# Altium PCB 板.PcbDoc (part 2 of 4)
Units mm, origin at the board's own origin, x right, y up, seen from the top; angles counter-clockwise.
Board outline 152.4 x 101.6 mm, 4 copper layers (Top Layer, VCC, GND, Bottom Layer); 183 components, 548 nets, 1331 pads, 689 vias.
Unrouted connection lines stored in the file: 6.
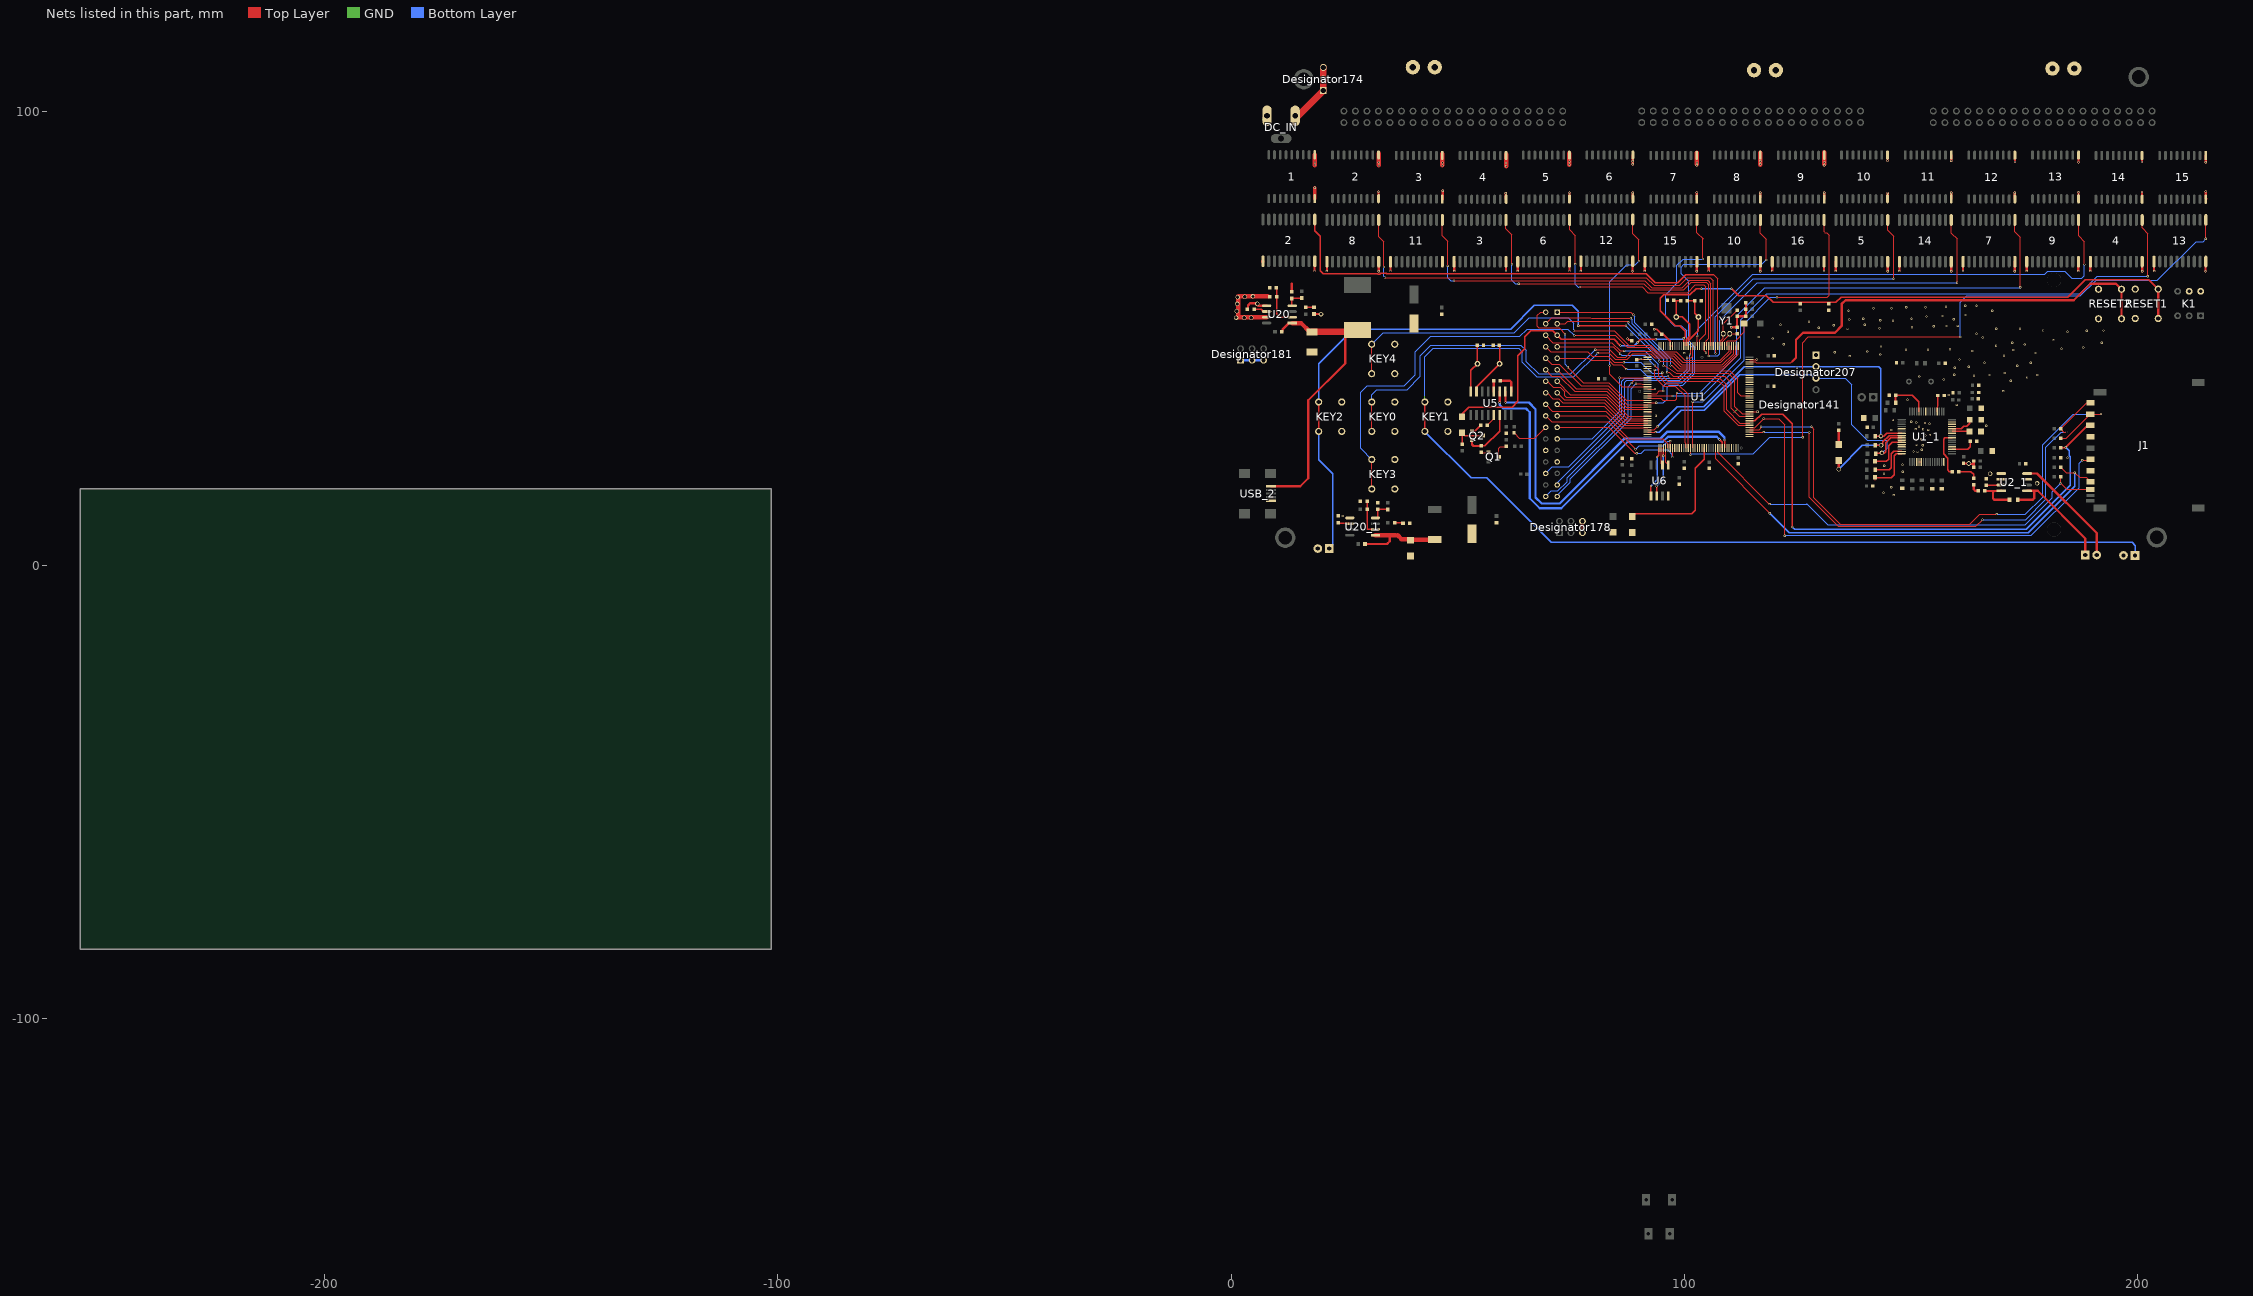
[diagram p4: the nets of this part, all layers, seen from the top]

## Via types
v1: diameter 0.5, hole 0.3, Top Layer to Bottom Layer, 646 vias
v2: diameter 1, hole 0.711, Top Layer to Bottom Layer, 35 vias
v3: diameter 0.5, hole 0.4, Top Layer to Bottom Layer, 2 vias
v4: diameter 1.27, hole 1.016, Top Layer to Bottom Layer, 2 vias
v5: diameter 1, hole 1, Top Layer to Bottom Layer, 2 vias
v6: diameter 3, hole 3, Top Layer to Bottom Layer, tented both sides, 2 vias

## Nets (pads, with @x,y where several pads share a name; then routed paths per layer and width w, separated by ;. In a path a pad name is that pad's centre, name@x,y a point inside that pad or via, vN(x,y) a via of type N, cw(c..) or ccw(c..) an arc to the next point about the centre after c; other vN are vias at no path point) (continued)
DIN1-3: K1.5 R1.2 U20.7 | length 17.3
  Top Layer w1: U20.7@7.826,54.635 4.445,54.635 1.576,54.635 1.576,59.233 v2(4.801,59.233) 8.077,59.233
  other v2: 2.87,54.534 4.445,54.534 1.092,54.559 1.245,55.982 1.346,57.582 1.422,59.055 2.972,59.182
EN: R1.1 R5.2@9.982,61.189 U20.2 | length 9.3
  Top Layer w0.3: R5.2@9.982,61.189 10.008,61.163 10.008,59.208 R1.1@10.034,59.182 10.034,57.023 10.058,56.999 10.058,55.448 10.871,54.635 U20.2@13.259,54.635
EN1: R1_2.1 R5_1.2 U20_1.2 | length 7.9
  Top Layer w0.3: R5_1.2@29.999,14.072 R1_2.1@29.999,12.268 29.999,8.024 30.175,7.849 U20_1.2@31.801,7.849
"F CS": U1.73 U6.1 | length 11.3
  Top Layer w0.3: U6.1@92.583,15.189 v1(92.583,17.424) ; v1(93.929,23.825) 94.323,24.219 U1.73@94.323,25.812
  Bottom Layer w0.3: v1(92.583,17.424) 93.929,18.771 v1(93.929,23.825)
FB: R4.1 R6.2 U20.4 | length 3.9
  Top Layer w0.3: U20.4@13.462,57.175 13.36,57.277 R4.1@13.36,58.776 13.411,58.826 15.494,58.826 R6.2@15.545,58.877
FB1: R4_1.1 R6_2.1 U20_1.4 | length 4.5
  Top Layer w0.3: U20_1.4@31.801,10.389 32.217,10.389 32.36,10.532 R4_1.1@32.36,12.267 32.372,12.254 34.48,12.254 R6_2.1@34.493,12.241
"FIFO OE": 
"FIFO RCLK": U1.134
"FIFO RRST": 
"FIFO WEN": U1.133
"FIFO WRST": 
FREQ: R3.1@5.055,56.439 U20.6 | length 3
  Top Layer w0.3: R3.1@5.055,56.439 6.581,56.439 7.114,55.905 U20.6@7.826,55.905
FREQ1: R3_1.1 U20_1.6 | length 2.6
  Top Layer w0.3: R3_1.1@23.622,9.346 23.79,9.178 26.105,9.178 U20_1.6@26.165,9.119
"FSMC A6": 12.11@88.57,76.203 U1.50 | length 48
  Top Layer w0.254: v1(83.49,43.993) 83.49,42.113 83.464,42.088 86.241,39.312 U1.50@91.823,39.312 ; 12.11@88.57,76.203 88.57,73.101 89.941,71.73 v1(89.941,67.031)
  Bottom Layer w0.254: v1(83.49,43.993) 83.49,62.433 87.249,66.192 89.103,66.192 v1(89.941,67.031)
"FSMC A7": 15.11@102.718,76.104 U1.53 | length 56
  Top Layer w0.25: U1.53@91.823,37.812 93.895,37.812 94.463,38.379 v1(95.301,38.379)
  Top Layer w0.254: 15.11@102.699,76.092 15.11@102.699,76.101 ; 15.11@102.718,76.104 102.718,73.304 104.064,71.958 104.038,71.933 v1(104.038,67.488)
  Bottom Layer w0.254: v1(95.301,38.379) 95.301,39.441 96.017,40.157 99.365,40.157 101.771,42.563 101.771,47.943 100.457,49.256 100.457,51.664 99.314,52.807 97.739,52.807 95.834,54.712 95.834,59.614 98.323,62.103 98.323,66.116 99.695,67.488 v1(104.038,67.488)
"FSMC A8": 4.11@200.921,76.101 U1.54 | length 139.1
  Top Layer w0.25: U1.54@91.823,37.312 91.825,37.31 97.31,37.31 v1(97.333,37.287) ; 4.11@200.921,76.101 200.921,74.365 202.184,73.101 202.184,63.729 v1(202.159,63.703)
  Bottom Layer w0.254: v1(97.333,37.287) 103.937,37.287 112.37,45.72 112.37,54.077 118.085,59.792 187.122,59.792 191.033,63.703 v1(202.159,63.703)
"FSMC A9": 7.11@172.857,76.101 U1.55 | length 114
  Top Layer w0.2: U1.55@91.823,36.812 94.76,36.812 95.225,36.347 97.968,36.347 98.323,36.703 v1(98.323,37.922)
  Top Layer w0.25: 7.11@172.857,76.101 172.857,73.523 174.041,72.339 v1(174.041,61.239)
  Bottom Layer w0.2: v1(98.323,37.922) 103.276,37.922 111.481,46.126 111.481,54.94 117.729,61.189 v1@174.126,61.189
"FSMC A10": Designator141.2 U1.56 | length 39.5
  Top Layer w0.2: Designator141.2@69.361,55.755 68.252,55.755 67.539,55.042 67.539,52.603 67.869,52.273 72.314,52.273 73.66,50.927 73.635,50.902 v1(73.635,50.883) ; v1(74.27,43.612) 77.699,40.183 83.312,40.183 87.183,36.312 U1.56@91.823,36.312
  Bottom Layer w0.2: v1(73.635,50.883) 73.635,44.247 v1(74.27,43.612)
"FSMC A11": 10.11@116.731,76.101 U1.57 | length 68.1
  Top Layer w0.2: U1.57@91.823,35.812 93.368,35.812 93.366,35.814 v1(93.751,35.814)
  Top Layer w0.25: 10.11@116.731,76.101 116.738,76.093 116.731,76.085 116.731,73.185 118.034,71.882 v1(118.034,67.285)
  Bottom Layer w0.2: v1(93.751,35.814) 95.348,35.814 96.139,36.605 96.139,39.167 96.571,39.599 99.593,39.599 102.241,42.247 102.241,48.076 100.889,49.428 100.889,62.611 99.212,64.287 99.212,65.71 99.797,66.294 117.043,66.294 v1(118.034,67.285)
"FSMC A12": 13.11@214.96,76.126 U1.87 | length 155.7
  Top Layer w0.2: v1@101.323,24.335 U1.87@101.323,25.812 ; v1(126.035,28.194) 126.035,49.073 127.254,50.292 v1(160.782,50.292) ; v1(214.96,71.933) 13.11@214.96,76.126
  Bottom Layer w0.2: v1(101.321,24.333) 101.566,24.578 115.162,24.578 118.803,28.219 118.828,28.194 v1(126.035,28.194) ; v1(160.782,50.292) 160.824,50.334 160.824,57.954 162.235,59.365 187.299,59.365 190.748,62.814 204.292,62.814 212.801,71.323 214.351,71.323 v1(214.96,71.933)
"FSMC A13": 16.11 U1.88 | length 72.1
  Top Layer w0.254: v1@101.803,36.017 v1(101.823,35.997) U1.88@101.823,25.812 ; v1(120.371,59.055) 131.445,59.055 131.902,59.512 131.902,72.72 131.318,73.304 130.911,73.304 130.762,73.453 16.11@130.762,76.101
  Bottom Layer w0.254: v1(101.823,35.997) 104.044,35.997 113.157,45.11 113.157,53.264 118.927,59.034 120.349,59.034 v1(120.371,59.055)
"FSMC A14": U1.89
"FSMC A15": U1.90
"FSMC A16": U1.80
"FSMC A17": U1.81
"FSMC A18": U1.82
"FSMC D0": Designator141.6 U1.85 | length 51.2
  Top Layer w0.254: Designator141.6@69.361,50.675 70.964,49.073 83.974,49.073 85.828,47.219 v1(86.69,47.219) ; v1(93.396,43.028) 93.396,41.427 95.377,39.446 97.993,39.446 100.138,37.301 100.138,26.986 100.277,26.847 100.277,25.858 U1.85@100.323,25.812
  Bottom Layer w0.254: v1(86.69,47.219) 91.262,47.219 94.209,44.272 94.209,43.028 v1(93.396,43.028)
"FSMC D1": Designator141.7 U1.86 | length 46
  Top Layer w0.254: Designator141.7@71.907,48.133 84.226,48.133 v1(85.776,46.584) ; v1(93.472,43.993) 94.285,43.18 94.285,41.605 95.885,40.005 98.425,40.005 100.823,37.607 U1.86@100.823,25.812
  Bottom Layer w0.254: v1(85.776,46.584) 85.842,46.584 86.122,46.304 91.161,46.304 v1(93.472,43.993)
"FSMC D2": Designator141.8 U1.114 | length 55.9
  Top Layer w0.254: Designator141.8@69.367,48.133 70.485,47.015 78.638,47.015 79.629,46.025 83.185,46.025 84.506,44.704 v1(86.614,44.704) ; v1(95.047,42.418) 95.047,41.758 96.266,40.538 107.569,40.538 108.712,39.395 108.712,33.909 111.809,30.812 U1.114@114.323,30.812
  Bottom Layer w0.254: v1(86.614,44.704) 90.38,44.704 92.819,42.266 94.894,42.266 v1(95.047,42.418)
"FSMC D3": Designator141.9 U1.115 | length 51.7
  Top Layer w0.2: Designator141.9@71.901,45.595 78.916,45.595 79.375,45.136 83.312,45.136 84.277,44.171 86.182,44.171 v1(87.147,43.205) ; v1(96.317,41.681) 96.291,41.681 96.799,41.173 107.789,41.173 109.245,39.717 109.245,34.188 112.122,31.312 U1.115@114.323,31.312 U1.115@114.304,31.293
  Bottom Layer w0.2: v1(87.147,43.205) 90.195,43.205 91.719,41.681 v1(96.317,41.681)
"FSMC D4": Designator141.10 U1.58 | length 26.7
  Top Layer w0.2: Designator141.10@69.367,45.593 70.663,44.298 72.39,44.298 77.165,39.522 83.134,39.522 87.345,35.312 U1.58@91.823,35.312
"FSMC D5": Designator141.11 U1.59 | length 23.3
  Top Layer w0.2: Designator141.11@71.907,43.053 76.098,38.862 83.033,38.862 87.083,34.812 U1.59@91.823,34.812
"FSMC D6": Designator141.12 U1.60 | length 26.1
  Top Layer w0.2: Designator141.12@69.367,43.053 70.739,41.681 72.365,41.681 75.743,38.303 82.829,38.303 86.821,34.312 U1.60@91.823,34.312
"FSMC D7": Designator141.13 U1.63 | length 23.1
  Top Layer w0.2: Designator141.13@71.907,40.513 74.828,37.592 82.804,37.592 87.611,32.785 91.796,32.785 U1.63@91.823,32.812
"FSMC D8": Designator141.14 U1.64 | length 26.4
  Top Layer w0.2: Designator141.14@69.367,40.513 69.672,40.513 70.993,39.192 72.542,39.192 73.558,38.176 73.558,37.324 73.9,36.982 82.677,36.982 87.348,32.312 U1.64@91.823,32.312
"FSMC D9": Designator141.15 U1.65 | length 22.5
  Top Layer w0.2: Designator141.15@71.907,37.973 73.457,36.424 82.423,36.424 87.035,31.812 U1.65@91.823,31.812
"FSMC D10": Designator141.16 U1.66 | length 25.2
  Top Layer w0.2: Designator141.16@69.367,37.973 69.698,37.973 70.968,36.703 72.263,36.703 73.127,35.839 82.245,35.839 86.773,31.312 U1.66@91.823,31.312
"FSMC D11": Designator141.17 U1.67 | length 21.8
  Top Layer w0.2: Designator141.17@71.907,35.433 72.288,35.052 82.245,35.052 86.486,30.812 U1.67@91.823,30.812
"FSMC D12": Designator141.18 U1.68 | length 24.6
  Top Layer w0.2: Designator141.18@69.367,35.433 70.841,33.96 82.601,33.96 86.249,30.312 U1.68@91.823,30.312
"FSMC D13": Designator141.19 U1.77 | length 27.9
  Top Layer w0.2: Designator141.19@71.907,32.893 82.702,32.893 87.711,27.885 95.201,27.885 96.323,26.763 U1.77@96.323,25.812
"FSMC D14": Designator141.20 U1.78 | length 32.8
  Top Layer w0.2: Designator141.20@69.367,32.893 70.714,31.547 83.134,31.547 v1(89.179,25.502) ; U1.78@96.823,25.812 96.824,25.813 v1(96.825,27.33) v1(96.825,27.33)
  Bottom Layer w0.2: v1(89.179,25.502) 89.992,26.314 95.26,26.314 96.275,27.329 v1(96.825,27.33) v1(96.825,27.33)
"FSMC D15": Designator141.21 U1.79 | length 31.2
  Top Layer w0.2: Designator141.21@71.907,30.353 83.261,30.353 88.976,24.638 v1(89.433,24.638) ; U1.79@97.323,25.812 97.349,25.785 97.349,23.816 v1(97.333,23.8)
  Bottom Layer w0.2: v1(89.433,24.638) 90.449,24.638 91.237,25.425 96.266,25.425 97.333,24.359 v1(97.333,23.8) v1@97.273,23.859
"FSMC NE3": 
"FSMC NE4": Designator141.1 U1.127 | length 53.7
  Top Layer w0.254: Designator141.1@71.901,55.755 88.136,55.755 88.671,55.22 v1(88.748,55.22) ; v1(96.901,44.018) 97.18,44.018 98.387,42.812 109.944,42.812 111.709,41.046 111.709,38.024 112.421,37.312 U1.127@114.323,37.312
  Bottom Layer w0.254: v1@88.595,55.194 88.987,54.803 88.987,53.38 96.901,45.466 v1(96.901,44.018)
"FSMC NOE": Designator141.4 U1.118 | length 61.4
  Top Layer w0.254: Designator141.4@69.361,53.215 70.731,54.585 79.325,54.585 79.503,54.407 v1(88.163,54.407) ; v1(96.139,42.494) 96.647,42.494 97.46,41.681 108.864,41.681 110.323,40.223 110.323,34.533 112.045,32.812 U1.118@114.323,32.812
  GND w0.254: 110.82,33.731 110.998,33.731 111.709,34.442
  Bottom Layer w0.254: v1(88.163,54.407) 88.417,54.153 88.417,53.264 96.139,45.542 v1(96.139,42.494)
"FSMC NWE": Designator141.3 U1.119 | length 55.6
  Top Layer w0.254: Designator141.3@71.901,53.215 73.687,53.215 74.193,53.721 87.452,53.721 v1(87.605,53.569) ; v1(95.359,43.945) 95.505,44.091 98.117,42.294 109.598,42.294 111.049,40.844 111.049,34.95 112.688,33.312 U1.119@114.323,33.312
  Bottom Layer w0.254: v1(87.605,53.569) 87.605,53.188 95.359,45.434 v1(95.359,43.945)
GBUF: 
GND: 1.9 2.1@7.01,67.003 2.9@32.512,80.797 2.10@18.44,67.003 3.1@49.174,66.901 3.9@46.558,80.696 3.10@60.604,66.901 4.1@189.491,66.901 4.9@60.63,80.67 4.10@200.921,66.901 5.1@133.364,66.901 5.9@74.6,80.747 5.10@144.794,66.901 6.1@63.206,66.901 6.9@88.595,80.772 6.10@74.636,66.901 7.1@161.427,66.901 7.9@102.692,80.696 7.10@172.857,66.901 8.1@21.11,66.901 8.9@116.713,80.747 8.10@32.54,66.901 9.1@175.459,66.901 9.9@130.81,80.721 9.10@186.889,66.901 10.1@105.301,66.901 10.9@144.755,80.772 10.10@116.731,66.901 11.1@35.142,66.901 11.9@158.826,80.772 11.10@46.572,66.901 12.1@77.14,67.003 12.9@172.847,80.747 12.10@88.57,67.003 13.1@203.53,66.926 13.9@186.889,80.768 13.10@214.96,66.926 14.1@147.396,66.901 14.9@200.889,80.67 14.10@158.826,66.901 15.1@91.288,66.904 15.9@214.935,80.67 15.10@102.718,66.904 16.1 16.10 C1.1@141.503,17.424 C2_1.1 C3.1 C3_1.1 C3_2.1 C4.1@111.582,54.839 C4.2@40.361,53.289 C4_1.2 C4_2.2 C5.1 C6.1 C6_1.2 C7.1 C7_1.1 C8.1 C8_1.2 C9.1 C9_1.1 C10.1 C10_1.1 C11.2 C12.2 C13.2 C13_1.2 C14.2 C14_1.2 C15.2 C15_1.1 C16.2 C16_1.2 C17.2 C17_1.2 C18.2 C19.2 C19_1.2 C20.2 C20_1.2 C21.2 C21_1.1 C22.2 C32.2 C34_1.2 C37.1 C38.1 C39.1 C41.2 C42.1 C43.2 C44.1 D1_2.2 D1_3.2 D13.1 D13_1.1 DC_IN.2 Designator141.22 Designator141.26 Designator141.27 Designator178.5 Designator178.6 Designator181.1 Designator181.3 Designator181.5 Designator207.1 J1.3 J1.6 KEY0.1 KEY1.1 KEY2.1 KEY3.1 KEY4.1 P4_3.2 P4_4.2 pad.69 R1_1.1 R2.2@18.263,55.347 R2_2.2 R3.2@3.555,56.439 R3_1.2 R4.2 R4_1.2 R5.1 R5_1.1 R10_1.1 R23_1.1 R32_1.2 RESET1.2 RESET2.2 U1.16 U1.30 U1.31 U1.38 U1.51 U1.61 U1.71 U1.83 U1.94 U1.107 U1.120 U1.130 U1.143 U1_1.4 U1_1.10 U1_1.14 U1_1.25 U1_1.37 U1_1.52 U1_1.64 U2_1.1 U2_1.7 U5.1 U6.4 U20.5 U20_1.5 USB_2.5 | length 145.1
  Top Layer w0.2: C43.2@62.381,29.121 63.562,27.94 66.946,27.94 Designator141.22@69.361,30.355 ; 68.28,29.266 Designator141.22@69.367,30.353 ; C18.2@81.013,41.073 C18.2@81.039,41.099 ; C20.2@89.41,45.352 U1.38@91.783,45.352 ; U1.61@91.823,33.812 92.774,33.812 ; U1.51@91.823,38.812 v1(93.472,38.811) ; U1.31@96.823,48.312 U1.30@97.323,48.312
  Top Layer w0.254: U1.16@104.323,48.312 104.323,47.214 v1(104.724,46.812) ; U1.120@114.323,33.812 pad.69@116.074,33.812 ; U1.143@114.323,45.312 v1@115.924,45.312 ; C3_1.1@140.259,30.074 C3_1.1@140.259,30.404
  Top Layer w0.3: v1@93.294,52.019 93.853,52.019 C9.1@94.996,50.876 95.322,50.876 96.8,49.398 U1.31@96.8,48.335 ; C41.2@98.804,17.599 C41.2@98.804,17.843
  Top Layer w0.5: R3.2@3.555,56.439 3.705,56.589 3.705,57.248 4.166,57.709 5.359,57.709 5.892,57.175 U20.5@7.826,57.175 ; R4.2@13.36,60.276 13.36,62.078 ; R2.2@18.263,55.347 v2(19.812,55.347) ; v1(18.364,64.821) 2.10@18.364,66.926 ; v1@21.11,64.849 8.1@21.11,66.901 ; U20_1.5@25.424,10.389 U20_1.5@26.165,10.389 ; v1(32.512,82.296) 32.512,81.102 32.41,81.001 2.9@32.563,80.848 ; v1(32.563,64.77) 8.10@32.563,66.878 ; v1@35.142,64.835 11.1@35.142,66.901 ; 3.9@46.66,80.594 46.66,82.144 46.685,82.169 v1(46.685,82.525) ; v1(49.174,64.821) 3.1@49.174,66.901 ; C37.1@59.309,40.665 61.468,40.665 61.747,40.386 U5.1@61.747,38.236 ; v1(60.554,81.966) 60.554,80.747 4.9@60.604,80.696 ; v1(60.604,64.821) 3.10@60.604,66.901 ; C43.2@62.355,29.096 C43.2@62.381,29.121 ; v1(63.195,64.821) 63.206,64.831 6.1@63.206,66.901 ; Designator141.26@69.03,25.277 Designator141.26@69.363,25.277 ; Designator141.22@69.367,30.353 Designator141.22@69.367,30.616 ; 5.9@74.6,80.747 v1(74.6,82.093) ; v1(74.625,64.821) 6.10@74.625,66.89 ; v1@77.14,64.846 12.1@77.14,67.003 ; v1(87.401,49.886) 87.664,49.623 88.259,49.623 C44.1@88.39,49.492 ; v1(88.494,64.795) 12.10@88.494,66.926 ; 6.9@88.595,80.772 v1(88.595,82.118) ; v1(91.237,64.821) 15.1@91.237,66.548 ; v1(102.692,64.795) 15.10@102.692,66.894 ; 7.9@102.692,80.696 v1(102.692,82.144) ; v1@105.301,64.838 10.1@105.301,66.901 ; v1(110.312,52.426) C3.1@111.582,52.426 C4.1@111.582,54.839 113.524,54.839 C14.2@113.524,57.836 ; 8.9@116.662,81.102 116.713,81.153 v1(116.713,82.093) ; v1(116.713,64.795) 10.10@116.713,66.883 ; v1@119.332,64.849 16.1@119.332,66.901 ; v1(130.734,64.821) 16.10@130.734,66.872 ; 9.9@130.81,80.721 v1(130.81,82.093) ; v1@133.364,64.86 5.1@133.364,66.901 ; 10.9@144.755,80.772 144.78,80.797 v1(144.78,82.067) ; v1(144.831,64.77) 5.10@144.831,66.864 ; C20_1.2@145.141,37.444 C20_1.2@145.141,37.583 ; v1@147.396,64.846 14.1@147.396,66.901 ; v1(158.801,64.795) 14.10@158.801,66.876 ; v1(158.801,82.118) 158.801,80.848 11.9@158.852,80.797 ; v1@161.427,64.857 7.1@161.427,66.901 ; C2_1.1@161.519,22.454 161.582,22.39 v2(162.674,22.39) 162.763,22.301 163.792,22.301 ; C10_1.1@163.779,22.937 163.792,22.925 163.792,22.301 ; C7_1.1@163.805,21.514 163.792,21.526 163.792,22.301 ; C17_1.2@164.821,38.009 C17_1.2@164.859,38.048 ; C13_1.2@165.303,31.902 C13_1.2@165.43,32.029 ; C8_1.2@165.405,34.544 C8_1.2@165.456,34.595 ; v1(172.822,64.77) 7.10@172.822,66.865 ; 12.9@172.822,80.772 172.898,80.848 172.822,80.924 v1(172.822,82.093) ; v1@175.459,64.842 9.1@175.459,66.901 ; v1(186.842,64.821) 9.10@186.842,66.854 ; 13.9@186.864,80.793 186.893,80.823 v1(186.893,82.194) ; v1@189.491,64.827 4.1@189.491,66.901 ; J1.3@189.493,28.291 J1.3@189.743,28.042 ; 14.9@200.863,80.696 200.889,80.721 v1(200.889,82.271) ; v1(200.914,64.77) 4.10@200.914,66.894 ; 13.1@203.53,66.926 203.53,64.846 v1(203.556,64.821) ; v1(214.909,64.77) 13.10@214.909,66.876 ; v1(214.96,82.372) 214.96,80.848 15.9@215.036,80.772
  Top Layer w0.762: 2.1@6.934,66.926 2.1@7.01,67.003 ; 1.9@18.44,80.823 v1@18.44,83.16 ; Designator178.5@77.47,7.112 Designator178.6@77.47,9.652
  GND w0.254: 90.716,49.847 90.729,49.86
  GND w0.635: KEY3.1@36.093,16.612 KEY3.1@36.093,16.764
  GND w0.762: DC_IN.2@7.219,98.362 DC_IN.2@7.917,99.06
  Bottom Layer w0.5: Designator181.1@2.083,45.161 Designator181.3@4.623,45.161 Designator181.5@7.163,45.161
  other v1: 24.613,10.82 146.126,15.418 143.866,15.926 145.567,17.17 143.993,20.117 148.107,20.549 144.018,21.895 148.057,22.098 184.455,23.673 151.359,24.943 150.47,25.044 152.324,25.425 152.527,26.441 151.13,26.492 151.028,27.61 152.197,27.711 153.111,28.575 154.102,28.651 151.46,29.007 145.593,29.769 153.721,29.794 152.603,29.947 151.003,29.972 151.689,30.505 154.026,31.166 153.01,31.318 151.105,31.445 149.962,31.598 145.948,32.004 93.675,32.893 160.02,35.312 149.174,36.424 158.241,37.49 170.307,38.354 171.958,40.665 157.15,40.919 175.539,41.377 151.765,41.554 163.83,41.758 167.234,41.91 177.775,41.91 159.487,41.961 170.586,42.342 159.614,43.485 162.687,43.713 173.38,43.967 176.327,44.602 166.141,44.628 115.926,45.314 160.63,45.314 90.348,45.441 136.449,46.076 170.434,46.126 143.129,46.406 99.949,46.735 177.394,46.761 133.096,46.939 140.259,47.066 163.424,47.193 172.491,47.422 153.67,47.447 148.819,47.498 158.547,47.6 183.134,47.701 187.935,47.981 143.332,48.184 168.707,48.336 175.031,48.616 121.895,48.692 172.237,48.997 192.024,49.047 181.381,49.606 119.431,49.936 165.735,50.19 116.357,50.292 164.389,50.978 122.784,51.435 184.455,51.46 188.697,51.664 179.07,51.714 192.405,51.74 93.294,51.994 135.941,52.07 168.732,52.095 173.99,52.095 142.977,52.222 129.591,52.324 150.165,52.451 154.965,52.654 157.759,52.705 160.274,52.73 132.918,52.883 121.158,53.01 139.725,53.01 127.432,53.67 145.974,53.899 143.129,54 136.296,54.153 159.36,54.178 150.063,54.305 139.421,54.331 153.365,54.813 156.87,54.915 161.95,55.143 136.169,56.058 167.843,56.058 141.656,56.642 145.644,56.642 153.137,56.82 148.895,56.845 157.658,56.972 161.874,57.175 164.363,57.201 21.082,64.821 35.128,64.821 77.114,64.821 105.283,64.821 119.304,64.821 133.325,64.821 147.371,64.821 161.392,64.821 175.438,64.821 189.484,64.821 18.415,83.185
  other v2: 177.749,17.983 167.386,20.142 5.791,57.633
  other v3: 166.548,30.734
IIC_SCL: R17_1.2 U1_1.47 | length 9.3
  Top Layer w0.3: R17_1.2@142.011,21.057 142.037,21.031 145.161,21.031 145.618,21.488 145.618,24.486 146.178,25.046 U1_1.47@147.891,25.046
IIC_SDA: R18_1.2 U1_1.48 | length 11.2
  Top Layer w0.254: 142.008,18.742 R18_1.2@142.008,19.304
  Top Layer w0.3: R18_1.2@141.856,19.253 141.881,19.279 145.618,19.279 146.253,19.914 146.253,24.105 146.694,24.546 U1_1.48@147.891,24.546
IOVDD: 
"IWIRE DQ": 
"JOY CLK": J1.5 U1.113 | length 111.3
  Top Layer w0.254: U1.113@114.323,30.312 115.478,30.312 v1@117.462,32.296 ; v1(117.45,32.309) 120.752,32.309 122.072,30.988 v1(122.072,6.426) ; v1(187.706,23.114) 189.316,23.114 J1.5@189.493,23.291
  Bottom Layer w0.254: v1@122.098,6.325 122.301,6.528 176.505,6.528 187.02,17.043 187.02,22.428 v1(187.706,23.114)
"JOY DAT": J1.8 R28.1 U1.99 | length 96.4
  Top Layer w0.254: U1.99@107.323,25.812 107.323,24.822 118.708,13.437 v1(118.796,13.437) ; R28.1@182.931,19.456 v1(182.931,18.034) 184.302,16.662 J1.8@189.484,16.662
  Bottom Layer w0.254: v1(118.796,13.437) 126.924,13.437 126.949,13.462 131.572,8.839 175.082,8.839 181.102,14.859 181.102,16.205 v1(182.931,18.034)
"JOY LAT": J1.7 R27.1 U1.98 | length 103.5
  Top Layer w0.2: U1.98@106.823,25.812 106.823,23.384 v1(118.777,11.43) ; R27.1@182.931,21.575 184.16,20.345 v1(186.055,20.345) 186.073,20.345 187.114,19.304 188.555,19.304 J1.7@189.493,18.366
  Bottom Layer w0.3: v1(118.777,11.43) 123.095,7.112 175.844,7.112 186.055,17.323 v1(186.055,20.345)
JRDO: 
JTCK: U1.109
JTDI: U1.110
JTMS: U1.105
KEY0: KEY0.2 U1.3 | length 106.6
  Top Layer w0.254: KEY0.2@31.013,29.464 KEY0.2@31.013,35.964 ; v1@80.289,47.523 v1(80.315,47.498) 83.49,47.498 85.154,45.834 87.007,45.834 88.29,47.117 92.62,47.117 93.629,46.107 97.453,46.107 99.416,44.145 108.331,44.145 110.823,46.637 U1.3@110.823,48.312
  Bottom Layer w0.254: KEY0.2@31.013,35.964 31.013,37.567 32.106,38.659 38.811,38.659 41.732,41.58 41.732,46.177 44.069,48.514 63.902,48.514 65.1,47.316 65.1,44.875 67.847,42.128 74.945,42.128 v1(80.315,47.498)
KEY1: KEY1.2 P4_3.1 U1.2 | length 267.9
  Top Layer w0.2: v1(80.848,46.736) 80.95,46.838 83.254,46.838 84.752,45.339 87.325,45.339 88.57,46.584 92.549,46.584 93.452,45.68 97.22,45.68 99.187,43.713 108.509,43.713 111.323,46.527 U1.2@111.323,48.312
  Top Layer w0.3: KEY1.2@42.723,29.464 KEY1.2@42.723,35.964
  GND w0.254: KEY1.2@42.723,35.964 42.723,37.236
  Bottom Layer w0.254: KEY1.2@42.723,35.964 42.723,45.923 44.552,47.752 63.373,47.752 64.237,46.888 64.237,44.679 67.437,41.478 75.59,41.478 v1(80.848,46.736)
  Bottom Layer w0.3: KEY1.2@42.723,29.464 42.723,29.39 52.911,19.202 56.388,19.202 70.561,5.029 198.704,5.029 199.441,4.293 199.441,2.21 P4_3.1@199.339,2.108
KEY2: KEY2.2 P4_4.1 U1.1 | length 151.6
  Top Layer w0.2: v1(94.463,44.958) 97.18,44.958 98.831,43.307 108.668,43.307 111.823,46.462 U1.1@111.823,48.312 U1.1@111.823,48.602
  Top Layer w0.3: KEY2.2@19.304,29.464 KEY2.2@19.304,35.964 ; v1(76.53,52.756) v1(87.071,52.756)
  Bottom Layer w0.2: v1(87.071,52.756) 94.463,45.364 v1(94.463,44.958)
  Bottom Layer w0.3: KEY2.2@19.304,29.464 19.304,23.266 22.443,20.127 22.443,4.435 P4_4.1@21.641,3.632 ; KEY2.2@19.304,35.964 19.304,44.348 26.975,52.019 61.62,52.019 66.853,57.252 75.26,57.252 76.53,55.982 v1(76.53,52.756)
KEY3: KEY3.2 U1.4 | length 118.2
  Top Layer w0.254: KEY3.2@31.013,16.764 KEY3.2@31.013,23.264 ; v1(75.667,50.622) 84.734,50.622 87.325,48.031 92.347,48.031 93.817,46.561 97.723,46.561 99.621,44.664 108.018,44.664 110.323,46.968 U1.4@110.323,48.312
  Bottom Layer w0.254: KEY3.2@31.013,23.264 28.55,25.728 28.55,38.125 29.997,39.573 38.202,39.573 40.64,42.012 40.64,47.015 44.047,50.422 63.637,50.422 65.26,52.045 74.244,52.045 v1(75.667,50.622)
KEY4: KEY4.2 U1.5 | length 94.6
  Top Layer w0.254: KEY4.2@30.988,42.192 KEY4.2@30.988,48.692 ; v1(75.59,51.714) 84.48,51.714 87.706,48.489 92.532,48.489 94.005,47.015 98.12,47.015 100.018,45.118 107.83,45.118 109.823,47.11 U1.5@109.823,48.312
  Bottom Layer w0.254: KEY4.2@31.013,48.664 33.53,51.181 62.382,51.181 65.735,54.534 74.346,54.534 75.59,53.289 v1(75.59,51.714)
l1: 
l2: 
"LCD BL": Designator141.23 U1.46 | length 29.9
  Top Layer w0.2: v1(85.649,41.3) 85.66,41.312 U1.46@91.823,41.312
  Bottom Layer w0.2: Designator141.23@71.901,27.815 79.58,27.815 85.649,33.884 v1(85.649,41.3)
LED0: U1.135
LED1: 
LRCK: 
M1: 
M2: 
M2_2: 
M3: 
M3_1: C2.2 R2.1@18.263,56.847 | length 1.8
  Top Layer w0.3: C2.2@16.434,56.82 16.447,56.833 18.249,56.833 R2.1@18.263,56.847
M4: C2_2.2 R2_2.1 | length 1.8
  Top Layer w0.3: C2_2.2@36.069,9.296 36.095,9.271 37.871,9.271 R2_2.1@37.897,9.246
M5: C11_2.1 R31.1 U2_1.4 | length 9.2
  Top Layer w0.5: C11_2.1@166.192,16.358 166.211,16.338 168.314,16.338 ; U2_1.4@169.839,16.358 169.82,16.338 168.314,16.338 ; R31.1@171.657,14.376 168.314,14.376 168.021,14.669 168.021,16.046 168.314,16.338
M6: C11_1.2 C11_3.1 | length 4.3
  Top Layer w0.3: C11_3.1@160.452,20.613 160.466,20.599 163.119,20.599 163.728,19.99 C11_1.2@163.728,19.239
M7: 
M8: 
MCLK: 
MIC_BIAS: C13_1.1 U1_1.12 | length 5.2
  Top Layer w0.3: U1_1.12@158.991,30.046 160.998,30.046 161.533,30.58 162.254,30.58 162.89,31.217 C13_1.1@162.89,32.029
MIC_N: U1_1.13
MIC_P: U1_1.15
"MP3 LEFT": 
"MP3 RIGHT": 
NetANT1_1: 
NetBAT_1: 
NetBEEP1_2: 
NetBOOT1_3: 
NetBOOT1_4: 
NetC3_2: C3.2@111.581,51.041 U1.8 Y1.2 | length 5
  Top Layer w0.2: U1.8@108.323,48.312 108.323,49.263 109.957,50.897 Y1.2@109.957,51.029 C3.2@111.568,51.029
NetC4_2: C4.2@111.584,56.223 U1.9 Y1.1 | length 9.5
  Top Layer w0.2: U1.9@107.823,48.312 107.823,49.329 108.534,50.04 Y1.1@108.534,51.029 108.534,53.173 C4.2@111.584,56.223
NetC7_2: C7.2 R2.1@99.187,58.318 U1.24 Y2.1 | length 13.8
  Top Layer w0.3: C7.2@97.612,58.344 97.625,58.331 98.171,58.331 ; Y2.1@98.171,54.712 98.171,58.331 ; Y2.1@98.323,54.712 99.517,54.712 101.117,53.111 101.117,50.434 100.323,49.64 U1.24@100.323,48.312 ; R2.1@99.187,58.318 99.174,58.331 98.171,58.331
NetC8_2: C8.2 R2.2@100.571,58.317 U1.23 Y2.2 | length 13.1
  Top Layer w0.3: R2.2@100.571,58.317 100.595,58.293 102.224,58.293 C8.2@102.248,58.269 102.248,55.515 Y2.2@103.051,54.712 ; U1.23@100.823,48.312 100.823,49.432 103.051,51.661 Y2.2@103.051,54.712 ; Y2.2@103.203,54.712 Y2.2@103.051,54.712
NetC11_2: C11_3.2 U1_1.8 | length 10.3
  Top Layer w0.3: U1_1.8@158.991,28.046 157.408,28.046 157.124,27.762 157.124,24.511 158.039,23.597 158.039,20.98 158.42,20.599 159.052,20.599 C11_3.2@159.068,20.615
NetC14_1: C14_1.1 U1_1.11 | length 3.9
  Top Layer w0.3: U1_1.11@158.991,29.546 162.758,29.546 C14_1.1@162.839,29.464
NetC22_1: 
NetC22_2: 
NetC30_2: 
NetC32_1: R32_1.1 U2_1.2 U2_1.3 | length 4.5
  Top Layer w0.254: U2_1.3@169.839,17.628 U2_1.2@169.839,18.898
  Top Layer w0.3: R32_1.1@166.572,17.64 166.578,17.634 169.833,17.634 U2_1.3@169.839,17.628
NetC33_1: C11_1.1 C11_2.2 | length 2.3
  Top Layer w0.5: C11_1.1@163.678,17.805 163.767,17.716 163.767,16.674 164.084,16.358 164.806,16.358 C11_2.2@164.808,16.359
NetC37_2: C37.2 U5.4 | length 2.4
  Top Layer w0.5: U5.4@57.937,38.236 C37.2@57.937,40.654
NetC38_2: C38.2 U5.7 Y3.1 | length 12.4
  Top Layer w0.3: U5.7@54.127,38.236 54.127,39.319 Y3.1@59.207,44.399 59.188,44.418 59.188,48.468 C38.2@59.169,48.487
NetC39_2: C39.2 U5.8 Y3.2 | length 10.9
  Top Layer w0.3: U5.8@52.857,38.236 52.857,42.929 Y3.2@54.327,44.399 54.297,44.429 54.297,48.485 C39.2@54.267,48.516
NetC46_1: 
NetC49_1: 
NetC49_2: 
NetC50_1: 
NetC50_2: 
NetC55_2: 
NetC57_1: 
NetC58_1: 
NetC66_2: 
NetC67_2: 
NetC68_2: 
NetC69_2: 
NetC70_1: 
NetC70_2: 
NetC74_2: 
NetC75_2: 
NetC76_2: 
NetC77_1: 
NetC77_2: 
NetC78_1: 
NetC78_2: 
NetC79_1: 
NetC80_1: 
NetC81_1: 
NetC82_1: 
NetC91_2: 
NetCAN1_1: 
NetCAN1_3: 
NetD1_1: D1_1.1 RX1.2 | length 3.2
  Top Layer w0.5: RX1.2@133.983,29.731 133.983,26.57 D1_1.1@133.985,26.568
NetD1_2: D1.2 U1.6 | length 7.5
  Top Layer w0.2: U1.6@109.323,48.312 109.323,49.263 109.572,49.512 111.237,49.512 113.132,51.406 D1.2@113.132,53.289
NetD4_1: 1.10 2.10@32.512,90.449 3.10@46.558,90.348 4.10@60.63,90.322 5.10@74.6,90.399 6.10@88.595,90.424 7.10@102.692,90.348 8.10@116.713,90.399 9.10@130.81,90.373 10.10@144.755,90.424 11.10@158.826,90.424 12.10@172.847,90.399 13.10@186.889,90.42 14.10@200.889,90.322 15.10@214.935,90.322 ?.1 ?.2 DC_IN.1 Designator174.1 Designator174.2 Designator174.3 K1.6 | length 44.6
  Top Layer w0.5: v1(88.595,88.367) 88.595,89.002 v1(88.57,89.027) 88.57,90.32 6.10@88.597,90.346 ; v1(144.755,89.179) 144.755,90.322 144.805,90.373 10.10@144.755,90.424 ; v1(158.826,89.129) 11.10@158.826,90.424 ; v1(172.872,88.9) 12.10@172.872,90.399 ; v1(186.889,88.845) 13.10@186.889,90.42 ; v1@200.889,88.875 14.10@200.889,90.322 ; v1(214.935,88.824) 15.10@214.935,90.322
  Top Layer w1: 1.10@18.44,90.475 18.466,90.449 v1(18.466,88.214) ; v1@32.588,88.214 2.10@32.588,90.78 ; v1@46.584,88.163 3.10@46.584,90.754 ; v1@60.681,87.986 60.681,88.671 4.10@60.681,90.551 ; v1@74.574,88.316 5.10@74.574,90.856 ; v1@102.718,88.367 7.10@102.718,90.957 ; v1@116.662,88.316 8.10@116.662,90.957 ; v1@130.81,88.417 9.10@130.81,90.373 9.10@130.81,91.008
  Top Layer w1.5: DC_IN.1@14.117,99.06 14.732,99.06 Designator174.1@20.32,104.648 Designator174.2@20.32,107.188 Designator174.3@20.32,109.728
  other v1: 60.63,87.96 32.588,88.087 46.584,88.087 102.699,88.163 130.81,88.189 74.6,88.265 116.713,88.367 60.604,88.671 46.609,88.722 102.743,88.722 18.491,88.798 32.54,88.798 130.835,88.849 200.863,88.875 74.6,88.925 116.713,89.078
NetD7_2: D7.2 Q2.3 R20.2 | length 7.4
  Top Layer w0.2: D7.2@50.927,29.159 D7.2@51.562,28.524
  Top Layer w0.3: R20.2@50.927,26.594 D7.2@50.927,29.159 ; D7.2@51.562,28.524 Q2.3@55.455,28.524
NetDS1_1: 
NetDS2_1: 
NetEJ_2: 
NetEJ_4: 
NetF1_2: 
NetLED2: 
NetP5_5: 
NetP5_6: 
NetQ1_2: Q1.2 R18.2 | length 1.7
  Top Layer w0.2: R18.2@55.116,24.879 55.22,24.775 Q1.2@56.737,24.775
NetQ1_3: Q1.3 R17.1 | length 3.8
  Top Layer w0.2: Q1.3@59.087,23.825 59.055,23.857 59.055,25.774 59.366,26.086 60.554,26.086 R17.1@60.706,26.238
NetQ2_2: Q2.2 R19.2 | length 2.5
  Top Layer w0.3: Q2.2@53.105,29.474 53.768,29.474 R19.2@55.08,30.786
NetQ3_2: 
NetR1_2: R1_1.2 U1_1.3 | length 5.8
  Top Layer w0.254: R1_1.2@163.005,27.341 R1_1.2@163.005,27.634
  Top Layer w0.3: U1_1.3@158.991,25.546 162.477,25.546 163.005,26.073 R1_1.2@163.005,27.332
NetR1_2_1: 
NetR4_1: 
NetR4_1_1: 
NetR14_1: 
NetR15_2: 
NetR18_1: Q2.1 R18.1 U5.14 | length 12.1
  Top Layer w0.3: R18.1@55.118,26.264 55.956,26.264 59.207,29.515 U5.14@59.207,33.036
  Top Layer w0.508: Q2.1@53.105,27.574 53.105,26.587 53.428,26.264 R18.1@55.118,26.264
NetR19_1: R19.1 U5.13 | length 2.9
  Top Layer w0.2: R19.1@56.464,30.785 57.937,32.258 U5.13@57.937,33.036
NetR26_1: 
NetR30_1: 
NetR31_1: 
NetR37_1: 
NetR42_1: 
NetR47_2: 
NetR55_1: 
NetR58_1: 
NetU1_53: U1_1.53 U1_1.54 | length 0.5
  Top Layer w0.254: U1_1.53@151.691,22.746 U1_1.54@152.191,22.746
NetU11_11: 
NewNet: 
"NRF CE": U1.91
"NRF CS": U1.92
"NRF IRQ": D1_3.1 U1.93 | length 29
  Top Layer w0.3: D1_3.1@88.468,10.693 89.068,11.293 101.54,11.293 102.337,12.09 102.337,21.387 104.323,23.373 U1.93@104.323,25.812
OUTL: 
OUTR: 
"OV SCL": U1.117
"OV SDA": 
"OV VSYNC": U1.100
PA0: U1.34
PA1: U1.35
PA2: U1.36
PA3: U1.37
PA4: U1.40
PA5: U1.41
PA6: U1.42
PA7: U1.43
PA9: U1.101 U5.3 | length 80.9
  Top Layer w0.3: v1(107.696,27.686) 108.323,27.059 U1.101@108.323,25.812
  Top Layer w0.5: v1(59.207,35.839) U5.3@59.207,38.236
  Bottom Layer w0.5: v1(59.207,35.839) 59.207,35.306 60.02,34.493 65.049,34.493 65.837,33.706 65.837,14.745 68.06,12.522 72.796,12.522 87.463,27.189 95.21,27.189 96.317,28.296 107.086,28.296 v1(107.696,27.686)
PA10: U1.102 U5.2 | length 80.7
  Top Layer w0.3: U1.102@108.823,25.812 v1(108.823,27.575)
  Top Layer w0.5: v1(60.477,35.839) U5.2@60.477,38.236
  Bottom Layer w0.5: v1(60.477,35.839) 65.659,35.839 67.132,34.366 67.132,14.91 68.478,13.564 72.441,13.564 86.766,27.889 94.666,27.889 96.139,29.362 107.594,29.362 108.823,28.134 v1(108.823,27.575)
PA11: U1.103
PA12: U1.104
PB1: Designator141.34 U1.47 | length 37.5
  Top Layer w0.2: v1(88.367,40.157) 89.021,40.812 U1.47@91.823,40.812
  Bottom Layer w0.2: Designator141.34@69.367,15.113 70.612,16.358 72.06,16.358 74.117,18.415 74.117,19.202 87.528,32.614 87.528,39.319 v1(88.367,40.157)
PB6: U1.136
PB9: U1.140
PB10: Designator207.2 R11_1.2 U1.69 U1_1.39 | length 78.4
  Top Layer w0.254: U1.69@91.823,29.812 93.312,29.812 v1(94.082,30.582) v1@94.107,30.582
  Top Layer w0.3: R11_1.2@142.011,28.397 143.891,28.397 144.539,29.046 U1_1.39@147.891,29.046
  Bottom Layer w0.3: v1(94.082,30.582) 98.4,34.9 104.267,34.9 113.106,43.739 Designator207.2@128.981,43.739 142.799,43.739 143.307,43.231 v2(143.307,28.448)
PB11: Designator207.3 R6_1.2 U1.70 U1_1.41 | length 80.4
  Top Layer w0.254: U1.70@91.823,29.312 v1(93.65,29.312)
  Top Layer w0.3: R6_1.2@142.494,24.638 144.069,24.638 144.374,24.943 144.374,26.919 145.5,28.046 U1_1.41@147.891,28.046
  Bottom Layer w0.254: Designator207.3@128.981,41.199 135.407,41.199 136.855,39.751 136.855,30.963 140.335,27.483 144.53,27.483 144.678,27.334 144.678,25.756 143.637,24.714 v2(143.51,24.714)
  Bottom Layer w0.3: v1(93.65,29.312) 94.412,29.312 99.263,34.163 104.369,34.163 112.166,41.961 127.975,41.961 128.737,41.199 Designator207.3@128.981,41.199
PB13: U1.74 U6.6 | length 3.9
  Top Layer w0.2: U1.74@94.823,25.812 94.823,22.347 U6.6@95.123,22.047
PB14: U1.75 U6.2 | length 11.2
  Top Layer w0.3: U6.2@93.855,15.189 v1@93.855,17.321 ; v1(95.323,24.076) U1.75@95.323,25.812
  Bottom Layer w0.3: v1(93.802,17.374) 95.323,18.894 v1(95.323,24.076)
PB15: U1.76 U6.5 | length 4
  Top Layer w0.2: U1.76@95.823,25.812 95.823,22.617 U6.5@96.393,22.047
PC10: J1.9 R22.1 U1.111 | length 112.7
  Top Layer w0.2: U1.111@114.323,29.312 v1(117.45,29.312) ; v1(127.508,29.21) 127.508,14.986 133.934,8.56 164.262,8.56 v1(165.71,10.008) ; v3(184.252,29.312) 183.667,29.312 R22.1@182.931,30.048 188.674,35.791 J1.9@189.493,35.791
  Bottom Layer w0.2: v1(117.45,29.312) 127.406,29.312 v1(127.508,29.21) ; v1(165.71,10.008) 175.209,10.008 179.68,14.478 179.68,25.933 183.058,29.312 v3(184.252,29.312)
PC11: J1.1 R24.1 U1.112 | length 123.9
  Top Layer w0.254: U1.112@114.323,29.812 116.492,29.812 116.84,30.159 v1(116.84,30.48) ; v1(128.016,30.48) 128.524,29.972 128.524,14.834 134.341,9.017 162.89,9.017 165.1,11.227 v1(168.834,11.227) ; R24.1@182.931,27.93 184.14,27.93 J1.1@189.484,33.274 191.872,33.274 v1(191.846,33.299)
  GND w0.254: v1(128.016,30.48) v1@128.168,30.48
  Bottom Layer w0.254: v1(116.84,30.48) v1(128.016,30.48) ; v1(168.834,11.227) 175.184,11.227 178.943,14.986 178.943,26.492 185.75,33.299 v1(191.846,33.299)
PC13: U1.7
PD2: J1.2 R25.1 U1.116 | length 116.9
  Top Layer w0.3: U1.116@114.323,31.812 115.505,31.812 116.967,33.274 121.615,33.274 123.774,31.115 v1(123.774,8.382) ; R25.1@182.931,25.811 183.952,25.811 188.925,30.785 J1.2@189.484,30.785 J1.2@189.687,30.582
  Bottom Layer w0.3: v1(123.774,8.382) 124.308,7.849 175.362,7.849 185.055,17.542 185.055,23.921 184.836,24.14 184.836,25.197 v1(184.074,25.959)
PD6: U1.122
PD7: U1.123
PE0: U1.141
PE1: RESET2.1 U1.142 | length 101.6
  Top Layer w0.25: U1.142@114.323,44.812 114.325,44.81 115.598,44.81 115.83,44.577 123.419,44.577 123.8,44.958
  Top Layer w0.5: 123.8,44.958 124.562,45.72 124.562,49.657 126.136,51.232 133.172,51.232 134.634,52.694 134.634,57.57 135.484,58.42 185.826,58.42 189.462,62.055 192.407,62.055 192.41,62.052 195.133,62.052 RESET2.1@196.367,60.818 RESET2.1@196.367,54.318
PE6: 
PF0: 2.11@18.44,76.203 U1.10 | length 116.7
  Top Layer w0.25: 106.477,64.008 107.323,63.162 U1.10@107.323,48.312
  Top Layer w0.3: 2.11@18.44,76.203 18.44,73.711 19.634,72.517 19.634,64.846 20.295,64.186 32.298,64.186 32.314,64.17 32.811,64.17 32.936,64.295 34.158,64.295 34.267,64.186 91.592,64.186 93.574,62.205 98.451,62.205 100.255,64.008 106.477,64.008
PF1: 5.11@144.794,76.101 U1.11 | length 66
  Top Layer w0.2: v1@106.823,46.676 U1.11@106.823,48.312
  Top Layer w0.25: 5.11@144.794,76.101 144.794,73.824 146.101,72.517 v1(146.101,63.144)
  Top Layer w0.3: v1(106.807,46.66) v1@106.823,46.676
  Bottom Layer w0.2: v1(106.807,46.66) 106.807,54.788 115.138,63.119 146.075,63.119 v1(146.101,63.144)
PF2: 8.11@32.54,76.101 U1.12 | length 101.8
  Top Layer w0.2: U1.12@106.296,48.339 U1.12@106.323,48.312
  Top Layer w0.25: 8.11@32.54,76.101 32.54,72.412 33.68,71.272 v1(33.68,65.735) ; v1(33.909,63.398) 91.533,63.398 93.26,61.671 98.882,61.671 100.609,63.398 105.631,63.398 106.323,62.706 U1.12@106.323,48.312
  Bottom Layer w0.25: v1(33.68,65.735) 33.68,63.695 33.909,63.466 v1(33.909,63.398)
PF3: 11.11@46.572,76.101 U1.13 | length 86.9
  Top Layer w0.25: 11.11@46.572,76.101 46.572,72.63 47.777,71.425 v1(47.777,65.964) ; v1(49.149,62.738) 91.161,62.738 92.735,61.163 99.466,61.163 101.117,62.814 105.054,62.814 105.823,62.046 U1.13@105.823,48.312
  Bottom Layer w0.25: v1(47.777,65.964) 47.777,63.373 48.412,62.738 v1(49.149,62.738)
PF4: 14.11@158.826,76.101 U1.14 | length 82.4
  Top Layer w0.2: v1@105.323,46.112 U1.14@105.323,48.312
  Top Layer w0.25: 14.11@158.826,76.101 158.826,73.178 160.096,71.907 v1(160.096,62.281)
  Bottom Layer w0.2: v1(105.334,46.101) 107.29,46.101 107.747,46.558 107.747,50.546 107.726,50.567 107.726,53.98 115.976,62.23 v1@160.122,62.23
PF5: 3.11@60.604,76.101 U1.15 | length 72.8
  Top Layer w0.2: U1.15@104.823,48.312 U1.15@104.833,48.321
  Top Layer w0.25: 3.11@60.604,76.101 60.604,74.143 61.925,72.822 v1(61.925,66.345) ; v1@63.398,62.052 v1(63.424,62.052) 90.995,62.052 92.392,60.655 99.771,60.655 101.448,62.332 104.8,62.332 105.308,61.824 105.308,49.987 104.833,49.512 U1.15@104.833,48.321
  Bottom Layer w0.25: v1(61.925,66.345) 61.925,62.763 62.636,62.052 v1(63.424,62.052)
PF6: 6.11@74.636,76.101 U1.18 | length 58.7
  Top Layer w0.2: U1.18@103.323,48.312 U1.18@103.323,48.459
  Top Layer w0.25: 6.11@74.636,76.101 74.651,76.086 74.636,76.071 74.636,73.929 75.895,72.669 v1(75.895,66.37) ; v1(76.911,61.316) 90.627,61.316 91.846,60.096 100.66,60.096 102.358,61.794 104.195,61.794 104.673,61.316 104.673,51.003 103.323,49.653 U1.18@103.323,48.459
  Bottom Layer w0.25: v1(75.895,66.37) 75.895,61.925 76.53,61.29 76.886,61.29 v1(76.911,61.316)
PF7: 9.11@186.889,76.101 U1.19 | length 108.1
  Top Layer w0.2: U1.19@102.823,48.312 102.846,48.335 v1(102.846,50.497)
  Top Layer w0.25: 9.11@186.889,76.101 186.889,72.572 188.189,71.272 v1(188.189,66.294) v1@188.189,66.167
  Bottom Layer w0.2: v1(102.846,50.497) 102.888,50.539 102.888,51.961 115.037,64.11 179.433,64.11 180.137,64.813 183.802,64.813 185.369,63.246 187.63,63.246 188.189,63.805 v1(188.189,66.294)
PF8: U1.20
PF9: Designator141.30 U1.21 | length 51.1
  Top Layer w0.25: v1(100.533,45.695) 101.448,45.695 101.823,46.07 U1.21@101.823,48.312
  Bottom Layer w0.2: Designator141.30@69.367,20.193 70.82,21.646 74.401,21.646 86.106,33.35 86.106,40.513 86.754,41.161 88.782,41.161 88.796,41.148 98.476,41.148 100.533,43.205 v1(100.533,45.695)
PF10: Designator141.31 U1.22 | length 49.7
  Top Layer w0.254: v1(101.194,46.431) 101.194,46.498 101.323,46.627 U1.22@101.323,48.312
  Bottom Layer w0.254: Designator141.31@71.907,17.653 71.907,18.136 86.843,33.071 86.843,40.361 87.216,40.734 88.606,40.734 88.619,40.721 98.887,40.721 101.194,43.028 v1(101.194,46.431)
PF11: Designator141.33 U1.49 | length 35
  Top Layer w0.2: v1@89.171,39.895 89.281,39.895 v1(89.281,40.005) 90.414,40.005 90.608,39.812 U1.49@91.823,39.812
  Bottom Layer w0.2: Designator141.33@71.907,15.113 71.78,15.24 74.803,18.263 74.803,18.999 88.214,32.41 88.214,38.857 89.281,39.924 v1(89.281,40.005)
PG6: 
PG9: U1.124
PG10: U1.125
PG11: U1.126
PG13: U1.128
PG14: U1.129
PG15: U1.132
"PWM AUDIO": 
PWR_IN: C34_1.1 U1_1.20 | length 3.9
  Top Layer w0.254: C34_1.1@155.854,37.387 C34_1.1@156.032,37.565
  Top Layer w0.3: U1_1.20@155.691,33.846 155.691,34.803 155.854,34.966 C34_1.1@155.854,37.387
"RADIO L": 
"RADIO R": 
RDY: D1_1.2 R9.2 U1_1.40 | length 21.1
  Top Layer w0.254: D1_1.2@133.985,23.068 D1_1.2@134.371,23.454
  Top Layer w0.3: R9.2@142.062,26.391 v2(143.332,26.391) 143.563,26.391 143.739,26.566 143.739,27.178 145.106,28.546 U1_1.40@147.891,28.546
  Top Layer w0.5: v2(133.985,21.141) D1_1.2@133.985,23.068
  Bottom Layer w0.3: v2(133.985,21.141) 139.235,26.391 v2(143.332,26.391)
RES: 
RESET: C6.2 D7.1 Designator141.5 R21.2 RESET1.1 U1.25 | length 201.3
  Top Layer w0.2: D7.1@50.927,32.715 D7.1@50.927,33.401 ; v1(99.822,49.987) v1@99.822,50.068
  Top Layer w0.3: D7.1@50.927,33.401 52.375,34.849 61.951,34.849 63.246,36.144 63.246,46.188 64.772,47.714 64.772,50.294 66.116,51.638 70.942,51.638 Designator141.5@71.907,50.673 72.796,49.784 84.48,49.784 v1(85.852,48.412) ; v1(89.662,49.149) 90.297,49.784 v1(93.675,49.784) ; v1@99.822,50.068 100.138,50.384 100.138,51.576 98.933,52.781 97.892,52.781 94.615,56.058 94.615,58.826 95.352,59.563 101.168,59.563 102.54,60.935 v1(103.708,60.935) ; U1.25@99.823,48.312 99.823,49.732 ; v1(110.363,60.935) 111.893,59.404 118.04,59.404 119.532,57.912 133.35,57.912 134.544,59.106 184.506,59.106 188.366,62.967 202.359,62.967 RESET1.1@204.47,60.856
  Top Layer w0.5: RESET1.1@204.47,54.356 RESET1.1@204.47,60.856
  Bottom Layer w0.2: 99.619,49.784 v1(99.822,49.987)
  Bottom Layer w0.3: v1(85.852,48.412) 88.925,48.412 v1(89.662,49.149) ; v1(93.675,49.784) 99.619,49.784 ; v1(103.708,60.935) v1(110.363,60.935)
RST: C20_1.1 R30.2 U1_1.28 | length 9.6
  Top Layer w0.254: R30.2@146.525,35.844 R30.2@146.558,35.812
  Top Layer w0.3: C20_1.1@146.525,37.443 150.238,37.443 151.691,35.989 U1_1.28@151.691,33.846
  Top Layer w0.5: R30.2@146.525,35.844 146.542,35.861 146.542,37.427 C20_1.1@146.525,37.443
RXD: 
SCLK: 
SDIN: 
SPI_CLK: U1_1.42
SPI_CS: R14_1.2 U1_1.43 | length 9.4
  Top Layer w0.3: R14_1.2@141.986,22.86 144.526,22.86 144.983,23.317 144.983,26.264 145.765,27.046 U1_1.43@147.891,27.046
SPI_MISO: U1_1.45
SPI_MOSI: U1_1.44
SPKL: P4_2.1 R31.2 U2_1.5 | length 26.3
  Top Layer w0.5: R31.2@173.457,14.376 176.796,14.376 177.089,14.669 177.089,16.358 ; U2_1.5@175.539,16.358 177.089,16.358 ; P4_2.1@188.34,2.21 188.366,2.236 188.366,5.867 177.876,16.358 177.089,16.358
SPKN: P4_2.2 U2_1.8 | length 25.6
  Top Layer w0.5: U2_1.8@175.539,20.168 177.749,20.168 190.88,7.037 P4_2.2@190.88,2.21
SS1: 
SW: C1.1@11.176,51.41 D13.2 L8.1 U20.1 USB_2.1 | length 65.5
  Top Layer w0.5: USB_2.1@8.782,17.348 15.214,17.348 17.018,19.152 17.018,36.322 25.139,44.443 25.139,50.294 26.06,50.294 27.201,51.435 27.56,51.794 L8.1@27.889,51.794 ; C1.1@11.176,51.41 11.326,51.56 11.326,51.941 12.751,53.365 U20.1@13.462,53.365 ; D13.2@17.343,51.435 D13.2@17.831,51.435
  Top Layer w1: U20.1@13.462,53.365 15.412,53.365 D13.2@17.343,51.435 ; L8.1@27.53,51.435 L8.1@27.889,51.794
  Top Layer w1.5: D13.2@17.831,51.435 20.218,51.435 ; 20.244,51.435 27.201,51.435 L8.1@27.53,51.435
sw1: C1_1.1 D13_1.2 L8_1.1 U20_1.1 | length 21.3
  Top Layer w0.5: C1_1.1@29.665,4.773 C1_1.1@29.515,4.623 34.392,4.623 35.001,5.232 35.001,6.579 ; U20_1.1@31.09,6.579 U20_1.1@31.801,6.579
  Top Layer w1: U20_1.1@31.801,6.579 35.001,6.579 36.347,6.579 ; 36.703,6.579 37.559,5.723 39.311,5.723 D13_1.2@39.573,5.461 39.65,5.538 44.855,5.538 L8_1.1@44.933,5.615
TPAD: 
TXD: 